# Altium PCB LPC55S69_MINI [C].PCBdoc (part 3 of 3)
Units mil, origin at the board's own origin, x right, y up, seen from the top; angles counter-clockwise.
Board outline 1610.03 x 1685.03 mil, 4 copper layers (Top Layer, PWR, GND, Bottom Layer), stack 39.556 mil thick; 73 components, 63 nets, 296 pads, 147 vias.
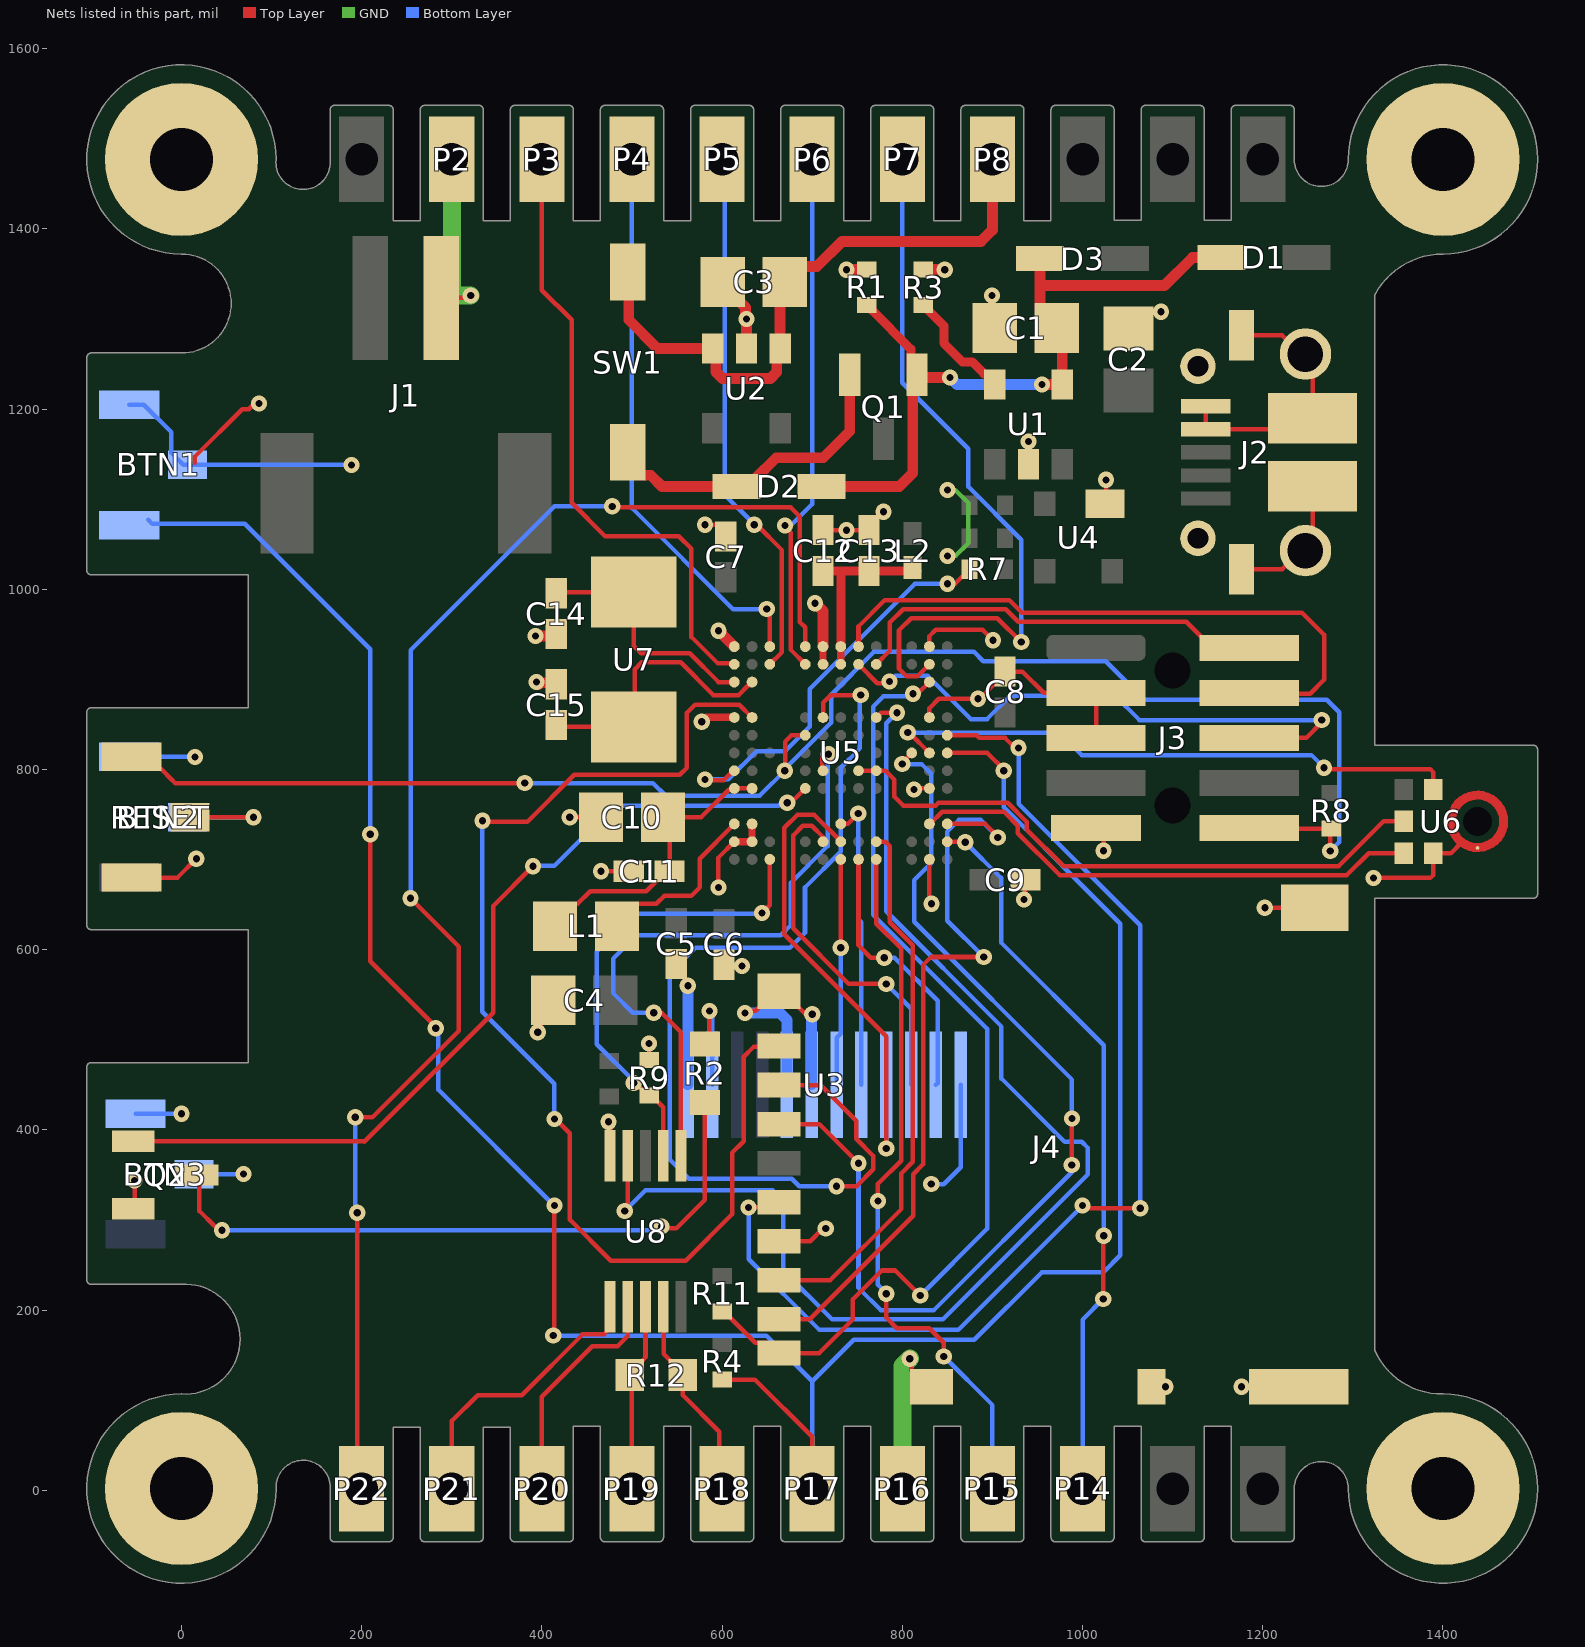
[diagram p4: the nets of this part, all layers, seen from the top]

## Via types
v1: diameter 18, hole 8, Top Layer to Bottom Layer, tented both sides, 147 vias

## Nets (pads, with @x,y where several pads share a name; then routed paths per layer and width w, separated by ;. In a path a pad name is that pad's centre, name@x,y a point inside that pad or via, vN(x,y) a via of type N, cw(c..) or ccw(c..) an arc to the next point about the centre after c; other vN are vias at no path point) (continued)
GND: BTN1.1 BTN1.S BTN2.1 BTN2.S BTN3.1 BTN3.S C1.1 C2.1 C3.1 C4.1 C5.1 C6.1 C7.1 C8.1 C9.1 C10.1 C11.1 C12.2 C13.1 C14.1 C15.1 J1.1 J2.4 J2.5 J2.MOUNT J3.3 J3.5 J3.9 J4.6 J4.CDA J4.M P2.1 P16.1 pad.2 Q2.2 R1.2 R3.1 R9.1 RESET.1 RESET.S U1.2 U2.2 U3.1 U3.5 U3.6 U3.12 U4.1 U5.B1 U5.B5 U5.B9 U5.B13 U5.H1 U5.H2 U5.M11 U5.M12 U5.N1 U5.N5 U5.N12 U6.2 U6.3 U8.5 | length 4054
  Top Layer w5: RESET.1@-55.43,680.07 -4.36,680.07 v1(16.57,701) ; Q2.2@-53.43,312.6 -52,314.03 v1(-52,344) ; RESET.S@9.53,747 v1(80,747) ; 15,1140.19 15,1147.26 67.5,1199.76 74.57,1199.76 v1@83.41,1208.59 ; v1@85.81,1211 85.81,1206.19 v1(86,1206) ; J1.1@288.37,1323.27 318.27,1323.27 v1(321,1326) ; v1(395.36,508.5) 398.72,511.87 398.72,530.17 C4.1@412.55,544 ; v1(431,747) C10.1@465.55,747 ; v1(465.55,687) C11.1@496.36,687 ; v1(474,409) 474,408 475.63,406.37 U8.5@475.63,371.32 ; R9.1@519,477.68 v1(519,495.94) ; C5.1@549,584 558.31,574.69 558.31,563.06 561.37,560 v1(562,560) ; v1(581,1071.5) 594.69,1071.5 604,1062.19 C7.1@604,1058.64 ; v1(596,669.08) 596,702.31 U5.N12@613.57,719.89 ; C6.1@602,583.36 602,582 v1(622,582) ; v1(625.45,529.86) 627.93,532.35 637.52,532.35 659.17,554.01 J4.M@663.11,554.01 680.3,536.82 684.18,536.82 693.24,527.76 699.38,527.76 v1(700,528.37) ; J4.6@663.11,276.45 697.77,276.45 712.05,290.74 v1(715.05,290.74) ; C12.2@712,1065.58 v1(738.09,1065.58) C13.1@763.06,1065.58 763.06,1070.5 772.37,1079.81 772.82,1079.81 v1(779,1086) ; v1(808.33,146.15) 810,144.48 810,133 827.97,115.03 J4.M@832.4,115.03 ; v1(813.02,777.87) 814.09,778.94 U5.B9@830.11,778.94 ; U5.B13@830.11,700.2 830.11,653.35 v1(832.4,651.06) ; U5.B5@830.11,857.69 830.11,868.11 840.6,878.6 v1(883.96,878.6) 885.6,878.6 901.41,894.41 904.69,894.41 C8.1@914,903.72 ; U5.B1@830.11,936.43 830.11,948.11 837,955 889,955 v1(900.58,943.43) ; v1(899.54,1326) 897.65,1324.1 897.65,1294.9 C1.1@902.55,1290 ; C8.1@914,904 C8.1@914,908.64 933.36,908.64 957.03,884.97 J3.3@1015,884.97 J3.5@1015,834.97 ; v1(935,655.62) 936.64,657.26 C9.1@936.64,677.69 ; J3.9@1015,734.97 1023.27,726.7 v1(1023.27,709.77) ; U4.1@1025,1094.8 1026.07,1095.88 v1(1026.07,1121.41) ; C2.1@1051,1289.45 1069.55,1308 v1(1087,1308) ; J4.CDA@1076.5,115.03 J4.CDA@1091.97,115.03 ; J2.MOUNT@1128.1,1247.47 J2.MOUNT@1134.68,1254.05 ; J2.5@1136.57,1203.18 J2.4@1136.57,1177.59 1242.96,1177.59 J2.MOUNT@1255.27,1189.89 1255.27,1253.18 1251.33,1257.12 1246.23,1257.12 1221.43,1281.92 J2.MOUNT@1176.53,1281.92 1176.53,1274.85 J2.MOUNT@1165.25,1263.57 ; J2.MOUNT@1172.15,1026.45 J2.MOUNT@1176.53,1022.08 1221.43,1022.08 1242.3,1042.94 J2.MOUNT@1247.39,1042.94 1255.27,1050.82 J2.MOUNT@1255.27,1114.11 ; v1@1176.56,115.03 J4.M@1239.88,115.03 ; v1(1202.32,646.53) J4.M@1257.6,646.53 1269.41,646.53 J4.M@1292.5,669.62 ; v1(1323,679.64) 1386.07,679.64 1389,682.57 U6.2@1389,707 1408.88,707 1420.97,719.09
  Top Layer w8: v1(577.5,853) 577.25,853.25 582,858 613.26,858 U5.N5@613.57,857.69 ; U5.N12@613.57,719.89 U5.M12@633.26,719.89 U5.M11@633.26,739.57 ; U5.H2@712,916.74 U5.H1@712,936.43
  Top Layer w12: v1(393,948) 413.64,948 C14.1@416,950.36 ; v1(394,897) 395,897 397,895 398.23,896.23 414.4,896.23 C15.1@416,894.64 ; v1(596,954) U5.N1@613.57,936.43 ; C3.1@605.88,1332.72 625.85,1312.75 625.85,1301.15 v1(627,1300) U2.2@627,1267.29 ; v1@704.25,983.53 712,975.79 U5.H1@712,936.43 ; v1(738.09,1354.68) R1.2@760.63,1354.69 ; R3.1@825.77,1351.92 R3.1@823,1354.68 v1(847.19,1354.68)
  GND w5: v1(850,1110) 859,1110 873,1096 873,1051 859.06,1037.06 v1(850.17,1037.06)
  GND w20: P2.1@300,1477 300,1326 v1(321,1326) ; P16.1@800,2 800,137.81 v1(808.33,146.15)
  Bottom Layer w5: BTN2.1@-58,813.93 v1(15,813.93) ; BTN1.1@-58,1204.93 -41.93,1204.93 -11.06,1174.06 -11.06,1151.25 2.19,1138 BTN1.S@6.96,1138 v1(188.63,1138) ; BTN3.1@-50.93,417.93 v1(-0.04,417.93) ; BTN2.S@6.96,747 76,747 v1@80,751 ; BTN3.S@15.03,350 BTN3.S@14.03,351 v1(69,351) ; v1@561.09,559 562,559.91 v1(562,560) ; v1@697.79,525.89 v1@699.31,527.41 ; U3.6@699.31,450.32 U3.6@699.53,450.11 ; v1(832.18,340.11) 832.65,339.64 846.07,339.64 864.88,358.45 U3.12@864.88,450.11
  Bottom Layer w12: U3.1@561.73,450.11 562,450.38 v1(562,560) ; v1(625.45,529.86) 664.25,529.86 671.97,522.14 U3.5@671.97,450.11 ; U3.6@699.31,450.32 v1@699.31,527.41
  other v1: 1092,115 1176.53,115 702.94,984.53 940,1164.08
ISP0: BTN1.2 P17.1 R4.1 U5.A7 | length 2836.1
  Top Layer w5: v1(209.63,728.13) 209.63,587.24 282.34,514.53 v1(282.34,512.8) ; v1(412.55,171.73) 412.55,169.65 413.88,168.32 v1(413.88,316) ; R4.1@600,122.91 636.47,122.91 700,59.38 P17.1@700,2 ; U5.A7@849.8,818.31 894.31,818.31 912.5,800.13 v1(912.5,798.63)
  Bottom Layer w5: BTN1.2@-37,1077.07 -32.61,1072.68 70.32,1072.68 209.63,933.37 v1(209.63,728.13) ; v1(282.34,512.8) 285.09,510.06 285.09,444.8 v1(413.88,316) ; v1@412.55,169.65 v1(412.55,171.73) 649.27,171.73 700,121 ; P17.1@700,2 700,121 ; v1(912.5,798.63) 912.5,758.29 1042,628.79 1042,260.81 1023.19,242 954.95,242 879.95,167 746,167 700,121
LCD_BL: Q2.1 U5.J9 | length 982.6
  Top Layer w5: Q2.1@-53.43,387.4 203.4,387.4 ; 202.88,386.88 203.4,387.4 ; v1(390,692.5) 346,648.5 346,530 203.4,387.4 ; v1(672.38,763.07) 672.38,759.01 U5.J9@692.32,778.94
  Bottom Layer w5: v1@391,693 414,693 480.97,759.97 662.95,759.97 663.56,760.59 669.89,760.59 v1(672.38,763.07)
LCD_CMD_DATA: U3.7 U5.G13 | length 252
  Top Layer w5: v1(731.69,602.28) U5.G13@731.69,700.2
  Bottom Layer w5: U3.7@727.09,450.11 727.09,502.28 731.69,506.87 731.69,598.76 v1(731.69,602.28)
LCD_RST: U3.11 U5.F13 | length 302.7
  Top Layer w5: U5.F13@751.37,700.2 751.37,604.78 765.15,591 v1(780,591)
  Bottom Layer w5: v1(780,591) 791.5,591 791.61,590.88 839.17,543.33 839.17,451.95 U3.11@837.32,450.11
LCD_SPI_CS: U3.8 U5.G11 | length 326.4
  Top Layer w5: U5.G11@731.69,739.57 739.57,739.57 v1(751,751)
  Bottom Layer w5: v1(751,751) 751,634 754.65,630.35 U3.8@754.65,450.11
LCD_SPI_MOSI: U3.10 U5.H12 | length 403.3
  Top Layer w5: U5.H12@712,719.89 712,725 699.41,737.59 689.62,737.59 678.82,726.79 678.82,702.62 678.82,694.61 678.82,628.59 678.82,623.79 740.61,562 v1(782.2,562)
  Bottom Layer w5: v1(782.2,562) 809.76,534.44 U3.10@809.76,450.11
LCD_SPI_SCK: U3.9 U5.G12 | length 555.1
  Top Layer w5: U5.G12@731.69,719.89 731.69,720.32 702.43,749.57 683.22,749.57 668.82,735.17 668.82,698.48 668.82,690.47 668.82,632.73 668.82,617.22 782.2,503.83 v1(782.2,379.28)
  Bottom Layer w5: v1(782.2,379.28) U3.9@782.2,450.11
MIC_BCLK: U5.B7 U6.4 | length 655.9
  Top Layer w5: v1(806,841) 809.3,841 809.58,840.72 808.64,839.78 U5.B7@830.11,818.31 ; v1(1268,802) 1269.87,800.13 1386.07,800.13 1389,797.2 U6.4@1389,777.87
  Bottom Layer w5: v1(806,841) 806.36,841 974,841 999,816 1254,816 v1(1268,802)
MIC_DATA: U5.E8 U5.F8 U6.6 | length 688.5
  Top Layer w5: U5.F8@751.37,798.63 U5.E8@771.06,798.63 781.31,798.63 791.06,788.87 791.06,769.94 801.03,759.97 836.96,759.97 840.06,763.07 916.93,763.07 938.27,741.73 938.27,733.27 979.04,692.5 1284.06,692.5 1333.99,742.43 U6.6@1356.64,742.43
MIC_WS: U5.B11 U6.1 | length 576.5
  Top Layer w5: U5.B11@830.11,739.57 830.7,739.57 844.2,753.07 912.78,753.07 928.27,737.59 928.27,729.13 974.89,682.5 1293.01,682.5 1317.51,707 U6.1@1356.64,707
NetC1_2: C1.2 D1.2 D2.1 D3.2 Q1.1 R1.1 U1.4 | length 851.4
  Top Layer w10: R1.1@760.63,1315.31 762.6,1315.31 766.46,1311.46 766.46,1309.49 809.59,1266.35 809.59,1244.68 Q1.1@816.4,1237.87
  Top Layer w12: D2.1@710.35,1114.11 796.68,1114.11 811.55,1128.97 811.55,1233.01 Q1.1@814.47,1235.93 ; Q1.1@816.4,1237.87 Q1.1@814.47,1235.93 ; v1(853,1235) 815.4,1235 Q1.1@814.47,1235.93 ; D3.2@952.76,1367 952.76,1339.32 ; v1(954.95,1227.29) U1.4@977.4,1227.29 977.4,1284.05 C1.2@971.45,1290 971.45,1292.95 952.76,1311.65 952.76,1339.32 ; D1.2@1154,1368 1122,1368 1091,1337 955.08,1337 952.76,1339.32
  Bottom Layer w12: v1(853,1235) 860.71,1227.29 v1(954.95,1227.29)
NetC10_2: C10.2 C11.2 L1.1 U5.M9 U5.N9 | length 329.9
  Top Layer w5: L1.1@414.55,626 414.55,628.95 436.66,651.06 439.61,651.06 453.55,665 516,665 527.41,676.41 527.41,677.69 536.72,687 C11.2@541.64,687 541.64,739.81 C10.2@534.45,747 576.63,747 607.23,777.61 612.24,777.61 U5.N9@613.57,778.94 U5.M9@633.26,778.94
NetC12_1: C12.1 C13.2 L2.2 U5.G1 U5.G2 | length 244.2
  Top Layer w5: C13.2@763.06,1016.06 C13.2@763.06,1020.31
  Top Layer w8: U5.G2@731.69,916.74 U5.G1@731.69,936.43
  Top Layer w10: C12.1@712,1020.31 C13.2@763.06,1020.31 ; U5.G1@731.69,936.43 731.69,1020.31 C13.2@763.06,1020.31 ; L2.2@817.01,1020.31 C13.2@763.06,1020.31
NetC14_2: C14.2 U5.N3 U7.2 | length 306.6
  Top Layer w5: C14.2@416,995.64 417.17,996.8 U7.2@502,996.8 ; U7.2@513,972.14 513,990.8 507,996.8 U7.2@502,996.8 ; U5.N3@613.57,897.06 595.94,897.06 564,929 510,929 502,937 U7.2@502,996.8
NetC15_2: C15.2 U5.M3 U7.1 | length 306.3
  Top Layer w5: C15.2@416,849.36 418.17,847.2 U7.1@502,847.2 503,848.2 503,911 511,919 554,919 590.44,882.56 618.22,882.56 629.17,893.5 630.53,893.5 633.26,896.23 U5.M3@633.26,897.06
NetD2_2: D2.2 Q1.2 SW1.1 | length 356.7
  Top Layer w12: SW1.1@495.32,1152 495.32,1140.19 509,1126.5 520.81,1126.5 533.21,1114.11 D2.2@615.87,1114.11 623.65,1121.89 635.89,1121.89 660,1146 712.19,1146 741.6,1175.41 Q1.2@741.6,1237.87
NetL1_2: L1.2 U5.N11 | length 197.6
  Top Layer w5: L1.2@483.45,626 483.45,628.95 505.56,651.06 527.06,651.06 536,660 566,660 575.08,669.08 575.08,701.08 U5.N11@613.57,739.57
NetQ2_3: Q2.3 R2.1 | length 734.6
  Top Layer w5: Q2.3@17.43,350 20,347.43 20,310 36.45,293.55 36.69,293.55 41.48,288.76 v1(45,288.76) ; v1(532.87,292.95) 535.14,290.68 549,290.68 581,322.68 R2.1@581,430.52
  Bottom Layer w5: v1(45,288.76) 528.69,288.76 v1(532.87,292.95)
NetR2_2: R2.2 U3.2 | length 123.5
  Top Layer w5: R2.2@581,495.48 580.68,495.8 583.44,498.56 581.73,500.27 586,504.54 v1(586,532)
  Bottom Layer w5: v1(586,532) 589,529 589,499 589.29,498.71 U3.2@589.29,450.11
NetR3_2: R3.2 U1.5 | length 131.3
  Top Layer w10: R3.2@823,1315.31 824.97,1315.31 828.83,1311.46 828.83,1309.49 846,1292.31 846,1273.15 866.71,1252.44 877.45,1252.44 890.87,1239.02 895.79,1239.02 902.6,1232.21 U1.5@902.6,1227.29
NetR7_1: R7.1 U5.N8 | length 451.6
  Top Layer w5: v1(581,789) 585.69,789 586.4,788.29 601.89,788.29 612.23,798.63 U5.N8@613.57,798.63 ; v1(850,1006) 858.55,1006 R7.1@874.63,1022.08
  Bottom Layer w5: v1(581,789) 607,789 638.5,820.5 670,820.5 697,847.5 697,889 814,1006 v1(850,1006)
PIO0_15: P5.1 U5.L2 | length 595.1
  Top Layer w5: v1(635.63,1071.5) 638.5,1071.5 666.44,1043.56 666.44,930.24 U5.L2@652.94,916.74
  Bottom Layer w5: P5.1@600,1477 603,1474 603,1104.63 635.63,1072 v1(635.63,1071.5)
PIO0_16: P6.1 U5.J2 | length 585.9
  Top Layer w5: v1(669.94,1070.86) 669.94,1069.06 676.44,1062.56 676.44,932.61 U5.J2@692.32,916.74
  Bottom Layer w5: v1(669.94,1070.86) 676.44,1070.86 700.11,1094.53 700.11,1476.89 P6.1@700,1477
PIO0_21: P14.1 U5.A12 | length 811
  Top Layer w5: U5.A12@849.8,719.89 869.29,719.89 v1(869.89,719.3) ; v1(1023,212.5) 1023.25,212.75 1023.25,282.27 v1(1023.5,282.52)
  Bottom Layer w5: v1(869.89,719.3) 909.54,679.64 909.54,607.98 1023.5,494.02 v1(1023.5,282.52) ; P14.1@1000,2 1000,189.5 v1(1023,212.5)
PIO0_23: P22.1 U5.J1 | length 1665.3
  Top Layer w5: v1(193,414) 212,414 308,510 308,603.28 v1(254.26,657.02) ; v1(195,308) 195,7 P22.1@200,2 ; v1(478,1092) v1@479,1091 ; v1@480,1090 v1@479,1091 ; U5.J1@692.32,936.43 692.32,957.68 686.44,963.56 686.44,1080.56 676,1091 v1@479,1091
  Bottom Layer w5: v1(193,414) 193,310 v1(195,308) ; v1(254.26,657.02) 254.26,932.26 414,1092 v1(478,1092)
PIO0_27: P3.1 U5.N2 | length 706.9
  Top Layer w5: P3.1@400,1477 400,1332 433,1299 433,1096 470.06,1058.94 552.06,1058.94 566,1045 566,947 594.92,918.08 612.24,918.08 U5.N2@613.57,916.74
PIO0_29: U5.H8 U8.1 | length 712.2
  Top Layer w5: v1(524.06,530.06) 532.81,530.06 554.37,508.5 U8.1@554.37,371.32 ; U5.H8@712,798.63 711,799.63 711,812.53 v1@717,818.53
  Bottom Layer w5: v1(524.06,530.06) 500.94,530.06 479,552 479,590 505,616 665,616 676.44,627.44 676.44,674.44 717,715 v1@717,818.53
  other v1: 718,817
PIO0_30: U5.E5 U8.4 | length 1403.6
  Top Layer w5: v1(492,310) 492,313.52 495.32,316.83 U8.4@495.32,371.32 ; U5.E5@771.06,857.69 776.37,863 793.25,863 v1(794,863)
  Bottom Layer w5: v1(492,310) 515,333 656,333 668,321 668,243.72 722.07,189.65 844.78,189.65 1006,350.87 1006,380 999,387 980,387 910,457 910,514.76 782.2,642.55 782.2,851.2 v1(794,863)
PIO0_31: P4.1 U5.L1 | length 625.9
  Top Layer w5: v1(649.6,978) 652.94,974.66 U5.L1@652.94,936.43
  Bottom Layer w5: P4.1@500,1477 500,1090.17 612.17,978 v1(649.6,978)
PIO1_4: P7.1 U5.B2 | length 828.1
  Top Layer w5: U5.B2@830.11,916.74 816.61,903.24 804.83,903.24 796.32,911.76 796.32,954.47 809.84,968 841.38,968 886.62,968 905.5,968 v1(932,941.5)
  Bottom Layer w5: P7.1@800,1477 800,1229.06 873,1156.06 873,1114 932,1055 v1(932,941.5)
PIO1_26: P15.1 U5.E13 | length 794
  Top Layer w5: U5.E13@771.06,700.2 771.06,628.94 798.7,601.3 798.7,365.87 772.95,340.11 v1(772.95,321.07) ; v1(782.2,218.18) 782.2,191.8 794,180 830,180 846,164 v1(846,148.72)
  Bottom Layer w5: v1(772.95,321.07) 772.95,228.26 782.2,219 v1(782.2,218.18) ; v1(846,148.72) 900,94.72 P15.1@900,2
PWR_SWITCH: C3.2 P8.1 SW1.2 U2.1 U2.3 | length 697
  Top Layer w12: SW1.2@495.32,1352 496.36,1350.95 496.36,1299 528.07,1267.29 U2.3@589.6,1267.29 593.34,1263.55 593.34,1241.03 600.37,1234 653.63,1234 660.66,1241.03 660.66,1263.55 U2.1@664.4,1267.29 664.4,1335.95 C3.2@669.45,1341 686.47,1358.03 705.03,1358.03 733,1386 887.15,1386 900,1398.85 P8.1@900,1477
RE: R9.2 U5.L13 U8.2 | length 533.7
  Top Layer w5: v1(502,452) 503.23,452 506.23,449 516.92,438.31 R9.2@519,438.31 520.44,436.88 523.12,436.88 534.69,425.31 534.69,417.33 U8.2@534.69,371.32 ; v1(644.27,640.73) 652.94,649.4 U5.L13@652.94,700.2
  Bottom Layer w5: v1(502,452) 502,451.11 504.11,449 505.56,450.44 503.44,452.56 461,495 461,598 502.63,639.63 643.17,639.63 v1(644.27,640.73)
RST: J3.10 R8.1 RESET.2 U5.J6 | length 1783.7
  Top Layer w5: RESET.2@-36,812.21 -24.47,800.68 -22.75,800.68 -10.63,788.56 -7.04,784.97 v1(380.89,784.97) ; v1(669.45,798.63) 670,799.18 670,831 677,838 U5.J6@692.32,838 ; J3.10@1185,734.97 1185.66,734.31 R8.1@1276,734.31 1275,733.31 v1(1275,709.5)
  Bottom Layer w5: v1(380.89,784.97) 523.16,784.97 537.36,770.77 641.59,770.77 671.94,801.12 671.94,802.94 721.09,852.09 721.09,883.09 768.5,930.5 879.5,930.5 889.78,920.22 1025.89,920.22 1068.61,877.5 1270.83,877.5 1285,863.33 1285,719.5 v1(1275,709.5)
RX_N: P19.1 R12.2 U8.8 | length 210.3
  Top Layer w5: P19.1@500,2 500,125.47 R12.2@497.47,128 497.47,129.97 510.72,143.22 515,147.5 U8.8@515,204
RX_P: P18.1 R12.1 U8.9 | length 229.1
  Top Layer w5: U8.9@534.69,204 535,203.69 535,151.5 543.28,143.22 556.53,129.97 556.53,105.71 597,65.24 597,5 P18.1@600,2
SD_CD: J4.CDB R11.2 U5.B3 | length 1117.3
  Top Layer w5: R11.2@600,198.5 601.97,198.5 608.33,192.14 608.33,192.04 636.66,163.71 651.83,163.71 J4.CDB@663.11,152.43 707.83,152.43 745.23,189.83 745.23,212.23 777,244 792.15,244 v1(819.91,216.24) ; v1@809,881 809,881.43 812.54,884.97 818.03,884.97 U5.B3@830.11,897.06
  Bottom Layer w5: 767.5,757.83 767.5,744.17 767.47,638.96 894,512.43 894,290.15 820,216.15 v1(819.91,216.24) ; 767.47,757.86 767.47,869.47 779,881 810,881 812,883 v1(812,884)
SD_CLK: J4.5 U5.A6 | length 1271
  Top Layer w5: v1(629.44,314.05) 657.4,314.05 J4.5@663.11,319.76 ; U5.A6@849.8,838 882.53,838 885.56,834.97 914,834.97 924.97,824 v1(929,824) ; v1(1000,316) 1003,313 v1(1064,313)
  Bottom Layer w5: v1(629.44,314.05) 629.44,256.56 708,178 862,178 v1(1000,316) ; v1(929,824) 929,762.07 1064,627.07 v1(1064,313)
SD_CMD: J4.3 U5.C7 | length 1131
  Top Layer w5: J4.3@663.11,406.37 708.06,406.37 v1(751.37,363.06) ; v1(800,806) 800,807.89 U5.C7@810.43,818.31 ; v1(988,361) 988,377.69 988.26,377.95 v1(988.26,412.66)
  Bottom Layer w5: v1(751.37,363.06) 751.37,224.63 776.28,199.72 801.49,199.72 801.56,199.65 834.65,199.65 988,353 v1(988,361) ; v1(800,806) 821.35,806 832.18,795.17 832.18,696.18 813.3,677.3 813.3,630.85 988.26,455.89 v1(988.26,412.66)
SD_D0: J4.7 U5.E12 | length 604.1
  Top Layer w5: J4.7@663.11,233.14 719.83,233.14 799,312.31 799,352.02 811.55,364.57 811.55,605.02 786,630.57 786,715 781.11,719.89 U5.E12@771.06,719.89
SD_D1: J4.8 U5.A11 | length 839.1
  Top Layer w5: J4.8@663.11,189.83 697.19,189.83 812,304.64 812,350.88 823,361.88 823,583 831.91,591.91 888.21,591.91 v1(890.31,591.91) ; U5.A11@849.8,739.57 892.27,739.57 906.02,725.83 v1(906.02,724.6)
  Bottom Layer w5: v1(890.31,591.91) 850,632.22 850,731.11 862.89,744 887.06,744 906.02,725.05 v1(906.02,724.6)
SD_D2: J4.1 U5.M5 | length 1324.9
  Top Layer w5: v1(334,743) 333,742 384,742 436,794 553,794 561,802 561,863 570,872 618.94,872 U5.M5@633.26,857.69 ; v1(413.88,411.99) 415.22,411.99 431,396.21 431,300.55 476.55,255 559.58,255 611,306.42 611,374.58 624,387.58 624,481.19 634.92,492.11 662.24,492.11 J4.1@663.11,492.98
  Bottom Layer w5: v1(334,743) 334,531 413.88,451.12 v1(413.88,411.99)
SD_D3: J4.2 U5.H5 | length 1131
  Top Layer w5: J4.2@663.11,449.68 709.37,449.68 748.77,410.28 748.77,390.21 767.87,371.1 767.87,356.23 749.21,337.57 v1(727.09,337.57) ; U5.H5@712,857.69 712,874.16 720.4,882.56 v1@748.77,882.56
  Bottom Layer w5: v1(727.09,337.57) 685.64,337.57 677.21,346 563.23,346 542,367.23 542,573.86 570.42,602.28 675.28,602.28 692,619 692,669.1 731.69,708.79 731.69,802 753,823.31 753,881.79 v1(753.77,882.56)
SWD_CLK: J3.4 U5.F1 | length 706.8
  Top Layer w5: U5.F1@751.37,936.43 751.37,958.74 780.63,988 849.67,988 878.33,988 918.76,988 932.73,974.03 1243.5,974.03 1268,949.52 1268,899.56 1252.51,884.07 1185.91,884.07 J3.4@1185,884.97
SWD_IO: J3.2 U5.E2 | length 475.4
  Top Layer w5: U5.E2@771.06,916.74 786.32,932 786.32,963.25 801.06,978 845.52,978 882.48,978 914.61,978 928.59,964.03 1114.97,964.03 1144.03,934.97 J3.2@1185,934.97
SWO: J3.6 U5.F2 | length 658.5
  Top Layer w5: U5.F2@751.37,916.74 772.28,895.83 784.58,895.83 785.91,897.16 v1(785.91,897.5) ; J3.6@1185,834.97 1248.08,834.97 1265.5,852.39 v1(1265.5,854.89)
  Bottom Layer w5: v1(785.91,897.5) 792.41,904 828,904 876,856 894,856 920,882 1036.02,882 1063.13,854.89 v1(1265.5,854.89)
TX_N: P20.1 U8.7 | length 257.9
  Top Layer w5: P20.1@400,2 400,104 456,160 484,160 495.32,171.31 U8.7@495.32,204
TX_P: P21.1 U8.6 | length 317.5
  Top Layer w5: P21.1@300,2 300,77 328.71,105.71 377.71,105.71 445,173 469,173 475.63,179.63 U8.6@475.63,204
pads on no net: J1.M1 J1.M2 J3.7 J3.8 J3.A U2.4 U5.A1 U5.A2 U5.B6 U5.B8 U5.B12 U5.C1 U5.C2 U5.E1 U5.E6 U5.E7 U5.E9 U5.F5 U5.F6 U5.F9 U5.F12 U5.G3 U5.G5 U5.G6 U5.G8 U5.G9 U5.H6 U5.H9 U5.J5 U5.J7 U5.J8 U5.J12 U5.J13 U5.L7 U5.M2 U5.M7 U6.PORT_HOLE
copper on no net: | length 0.6
  Top Layer w5: 633.26,916.15 633.26,916.74

## Polygon pours and split planes (outlines as drawn)
GND on GND "GND_L03_P001" (solid, remove dead copper, pour order 1): -300,1807 1790,1807 1790,-205 -300,-205
+3.3v on PWR "+3.3V_L02_P000" (solid, remove dead copper, pour order 0): -269,1730 -269,-444 1899,-444 1899,1730

## Keep-outs
Keep-Out Layer:
  lines w0.1: 0.03,1262.21 ccw(c0,1257.2) 0,1262.21 -100,1262.21 ccw(c-100,1257.2) -105.01,1257.2 -105.01,1020.98 ccw(c-100,1020.98) -100,1015.96 74.04,1015.96 74.04,868.51 -100,868.51 ccw(c-100,863.5) -105.01,863.5 -105.01,627.28 ccw(c-100,627.28) -100,622.26 74.04,622.26 74.04,474.81 -100,474.81 ccw(c-100,469.8) -105.01,469.8 -105.01,233.57 ccw(c-100,233.57) -100,228.56 0,228.56 ccw(c0,233.57) 0.32,228.57 ; 0.03,1262.21 ccw(c0.31,1317.1) 55.2,1317.1 ccw(c0.31,1317.1) 0.03,1371.99 ; 0.03,1262.21 0.03,1262.21 ; 0.03,1371.99 cw(c0,1377) 0,1371.99 cw(c0,1477) 105.01,1477 cw(c100,1477) 104.99,1476.51 ; 0.03,1371.99 0.03,1371.99 ; 0.35,107 ccw(c0,102) 0,107.01 ccw(c0,2) 105.01,2 ccw(c100,2) 105.01,2.2 ; 0.32,107 ccw(c4.21,167.79) 0.35,107 ; 0.35,107 ccw(c4.21,167.79) 65.12,167.79 ccw(c4.21,167.79) 0.32,228.57 ; 0.32,107 0.35,107 ; 0.32,228.57 0.32,228.57 ; 105.01,2.2 cw(c135,3.43) 165.01,3.43 cw(c135,3.43) 164.99,2.2 ; 105.01,2.2 105.01,2.2 ; 104.99,1476.51 cw(c135,1473.79) 104.99,1476.54 104.99,1476.51 ; 104.99,1476.51 ccw(c135,1473.79) 165.13,1473.79 ccw(c135,1473.79) 165.01,1476.51 ; 164.99,2.2 ccw(c170,2) 164.99,2 164.99,-52.09 ccw(c170,-52.09) 170,-57.11 230,-57.11 ccw(c230,-52.09) 235.01,-52.09 235.02,70.29 264.99,70.29 264.99,-52.09 ccw(c270,-52.09) 270,-57.11 330,-57.11 ccw(c330,-52.09) 335.01,-52.09 335.02,70.29 364.99,70.29 364.99,-52.09 ccw(c370,-52.09) 370,-57.11 430,-57.11 ccw(c430,-52.09) 435.01,-52.09 435.02,71.16 464.99,71.16 464.99,-52.09 ccw(c470,-52.09) 470,-57.11 530,-57.11 ccw(c530,-52.09) 535.01,-52.09 535.02,71.16 564.99,71.16 564.99,-52.09 ccw(c570,-52.09) 570,-57.11 630,-57.11 ccw(c630,-52.09) 635.01,-52.09 635.02,71.16 664.99,71.16 664.99,-52.09 ccw(c670,-52.09) 670,-57.11 730,-57.11 ccw(c730,-52.09) 735.01,-52.09 735.02,71.16 764.99,71.16 764.99,-52.09 ccw(c770,-52.09) 770,-57.11 830,-57.11 ccw(c830,-52.09) 835.01,-52.09 835.02,71.16 864.99,71.16 864.99,-52.09 ccw(c870,-52.09) 870,-57.11 930,-57.11 ccw(c930,-52.09) 935.01,-52.09 935.02,71.16 964.99,71.16 964.99,-52.09 ccw(c970,-52.09) 970,-57.11 1030,-57.11 ccw(c1030,-52.09) 1035.01,-52.09 1035.02,71.16 1064.99,71.16 1064.99,-52.09 ccw(c1070,-52.09) 1070,-57.11 1130,-57.11 ccw(c1130,-52.09) 1135.01,-52.09 1135.02,71.16 1164.99,71.16 1164.99,-52.09 ccw(c1170,-52.09) 1170,-57.11 1230,-57.11 ccw(c1230,-52.09) 1235.01,-52.09 1235.02,2 cw(c1265,2) 1294.99,2 ccw(c1400,2) 1505.01,2 ccw(c1400,2) 1400,107.01 ccw(c1400,102) 1399.88,107.01 ; 164.99,2.2 164.99,2.2 ; 165.01,1476.51 cw(c170,1477) 164.99,1477 164.99,1532 cw(c170,1532) 170,1537.01 230,1537.01 cw(c230,1532) 235.01,1532 235.02,1408.75 264.99,1408.75 264.99,1532 cw(c270,1532) 270,1537.01 330,1537.01 cw(c330,1532) 335.01,1532 335.02,1408.75 364.99,1408.75 364.99,1532 cw(c370,1532) 370,1537.01 430,1537.01 cw(c430,1532) 435.01,1532 435.02,1408.75 464.99,1408.75 464.99,1532 cw(c470,1532) 470,1537.01 530,1537.01 cw(c530,1532) 535.01,1532 535.02,1408.75 564.99,1408.75 564.99,1532 cw(c570,1532) 570,1537.01 630,1537.01 cw(c630,1532) 635.01,1532 635.02,1408.75 664.99,1408.75 664.99,1532 cw(c670,1532) 670,1537.01 730,1537.01 cw(c730,1532) 735.01,1532 735.02,1408.75 764.99,1408.75 764.99,1532 cw(c770,1532) 770,1537.01 830,1537.01 cw(c830,1532) 835.01,1532 835.02,1408.75 864.99,1408.75 864.99,1532 cw(c870,1532) 870,1537.01 930,1537.01 cw(c930,1532) 935.01,1532 935.02,1408.75 964.99,1408.75 964.99,1532 cw(c970,1532) 970,1537.01 1030,1537.01 cw(c1030,1532) 1035.01,1532 1035.02,1409.61 1064.99,1409.61 1064.99,1532 cw(c1070,1532) 1070,1537.01 1130,1537.01 cw(c1130,1532) 1135.01,1532 1135.02,1409.61 1164.99,1409.61 1164.99,1532 cw(c1170,1532) 1170,1537.01 1230,1537.01 cw(c1230,1532) 1235.01,1532 1235.02,1477 ccw(c1265,1477) 1294.99,1477 cw(c1400,1477) 1505.01,1477 cw(c1400,1477) 1400,1371.99 ; 165.01,1476.51 165.01,1476.51 ; 1399.88,107.01 cw(c1398.53,187.93) 1324.23,155.85 1324.23,656.99 1500,656.99 ccw(c1500,662) 1505.01,662 1505.02,822 ccw(c1500,822) 1500,827.01 1324.23,827.01 1324.23,1326.81 cw(c1400.19,1285.54) 1399.98,1371.98 ; 1399.88,107.01 ccw(c1398.53,187.93) 1399.91,107.01 ; 1399.88,107.01 1399.91,107.01 ; 1399.88,107.01 1399.88,107.01 ; 1400.01,1371.99 ccw(c1400.19,1285.54) 1399.98,1371.98 ; 1400,1371.99 1400.01,1371.99
  lines w1: 0.03,1262.21 ccw(c0,1257.2) 0,1262.21 -100,1262.21 ccw(c-100,1257.2) -105.01,1257.2 -105.01,1020.98 ccw(c-100,1020.98) -100,1015.96 74.04,1015.96 74.04,868.51 -100,868.51 ccw(c-100,863.5) -105.01,863.5 -105.01,627.28 ccw(c-100,627.28) -100,622.26 74.04,622.26 74.04,474.81 -100,474.81 ccw(c-100,469.8) -105.01,469.8 -105.01,233.57 ccw(c-100,233.57) -100,228.56 0,228.56 ccw(c0,233.57) 0.32,228.57 ; 0.03,1262.21 ccw(c0.31,1317.1) 55.2,1317.1 ccw(c0.31,1317.1) 0.03,1371.99 ; 0.03,1262.21 0.03,1262.21 ; 0.03,1371.99 cw(c0,1377) 0,1371.99 cw(c0,1477) 105.01,1477 cw(c100,1477) 104.99,1476.51 ; 0.03,1371.99 0.03,1371.99 ; 0.35,107 ccw(c0,102) 0,107.01 ccw(c0,2) 105.01,2 ccw(c100,2) 105.01,2.2 ; 0.32,107 ccw(c4.21,167.79) 0.35,107 ; 0.35,107 ccw(c4.21,167.79) 65.12,167.79 ccw(c4.21,167.79) 0.32,228.57 ; 0.32,107 0.35,107 ; 0.32,228.57 0.32,228.57 ; 105.01,2.2 cw(c135,3.43) 165.01,3.43 cw(c135,3.43) 164.99,2.2 ; 105.01,2.2 105.01,2.2 ; 104.99,1476.51 cw(c135,1473.79) 104.99,1476.54 104.99,1476.51 ; 104.99,1476.51 ccw(c135,1473.79) 165.13,1473.79 ccw(c135,1473.79) 165.01,1476.51 ; 164.99,2.2 ccw(c170,2) 164.99,2 164.99,-52.09 ccw(c170,-52.09) 170,-57.11 230,-57.11 ccw(c230,-52.09) 235.01,-52.09 235.02,70.29 264.99,70.29 264.99,-52.09 ccw(c270,-52.09) 270,-57.11 330,-57.11 ccw(c330,-52.09) 335.01,-52.09 335.02,70.29 364.99,70.29 364.99,-52.09 ccw(c370,-52.09) 370,-57.11 430,-57.11 ccw(c430,-52.09) 435.01,-52.09 435.02,71.16 464.99,71.16 464.99,-52.09 ccw(c470,-52.09) 470,-57.11 530,-57.11 ccw(c530,-52.09) 535.01,-52.09 535.02,71.16 564.99,71.16 564.99,-52.09 ccw(c570,-52.09) 570,-57.11 630,-57.11 ccw(c630,-52.09) 635.01,-52.09 635.02,71.16 664.99,71.16 664.99,-52.09 ccw(c670,-52.09) 670,-57.11 730,-57.11 ccw(c730,-52.09) 735.01,-52.09 735.02,71.16 764.99,71.16 764.99,-52.09 ccw(c770,-52.09) 770,-57.11 830,-57.11 ccw(c830,-52.09) 835.01,-52.09 835.02,71.16 864.99,71.16 864.99,-52.09 ccw(c870,-52.09) 870,-57.11 930,-57.11 ccw(c930,-52.09) 935.01,-52.09 935.02,71.16 964.99,71.16 964.99,-52.09 ccw(c970,-52.09) 970,-57.11 1030,-57.11 ccw(c1030,-52.09) 1035.01,-52.09 1035.02,71.16 1064.99,71.16 1064.99,-52.09 ccw(c1070,-52.09) 1070,-57.11 1130,-57.11 ccw(c1130,-52.09) 1135.01,-52.09 1135.02,71.16 1164.99,71.16 1164.99,-52.09 ccw(c1170,-52.09) 1170,-57.11 1230,-57.11 ccw(c1230,-52.09) 1235.01,-52.09 1235.02,2 cw(c1265,2) 1294.99,2 ccw(c1400,2) 1505.01,2 ccw(c1400,2) 1400,107.01 ccw(c1400,102) 1399.88,107.01 ; 164.99,2.2 164.99,2.2 ; 165.01,1476.51 cw(c170,1477) 164.99,1477 164.99,1532 cw(c170,1532) 170,1537.01 230,1537.01 cw(c230,1532) 235.01,1532 235.02,1408.75 264.99,1408.75 264.99,1532 cw(c270,1532) 270,1537.01 330,1537.01 cw(c330,1532) 335.01,1532 335.02,1408.75 364.99,1408.75 364.99,1532 cw(c370,1532) 370,1537.01 430,1537.01 cw(c430,1532) 435.01,1532 435.02,1408.75 464.99,1408.75 464.99,1532 cw(c470,1532) 470,1537.01 530,1537.01 cw(c530,1532) 535.01,1532 535.02,1408.75 564.99,1408.75 564.99,1532 cw(c570,1532) 570,1537.01 630,1537.01 cw(c630,1532) 635.01,1532 635.02,1408.75 664.99,1408.75 664.99,1532 cw(c670,1532) 670,1537.01 730,1537.01 cw(c730,1532) 735.01,1532 735.02,1408.75 764.99,1408.75 764.99,1532 cw(c770,1532) 770,1537.01 830,1537.01 cw(c830,1532) 835.01,1532 835.02,1408.75 864.99,1408.75 864.99,1532 cw(c870,1532) 870,1537.01 930,1537.01 cw(c930,1532) 935.01,1532 935.02,1408.75 964.99,1408.75 964.99,1532 cw(c970,1532) 970,1537.01 1030,1537.01 cw(c1030,1532) 1035.01,1532 1035.02,1409.61 1064.99,1409.61 1064.99,1532 cw(c1070,1532) 1070,1537.01 1130,1537.01 cw(c1130,1532) 1135.01,1532 1135.02,1409.61 1164.99,1409.61 1164.99,1532 cw(c1170,1532) 1170,1537.01 1230,1537.01 cw(c1230,1532) 1235.01,1532 1235.02,1477 ccw(c1265,1477) 1294.99,1477 cw(c1400,1477) 1505.01,1477 cw(c1400,1477) 1400,1371.99 ; 165.01,1476.51 165.01,1476.51 ; 1399.88,107.01 cw(c1398.53,187.93) 1324.23,155.85 1324.23,656.99 1500,656.99 ccw(c1500,662) 1505.01,662 1505.02,822 ccw(c1500,822) 1500,827.01 1324.23,827.01 1324.23,1326.81 cw(c1400.19,1285.54) 1399.98,1371.98 ; 1399.88,107.01 ccw(c1398.53,187.93) 1399.91,107.01 ; 1399.88,107.01 1399.91,107.01 ; 1399.88,107.01 1399.88,107.01 ; 1400.01,1371.99 ccw(c1400.19,1285.54) 1399.98,1371.98 ; 1400,1371.99 1400.01,1371.99

## Other copper
Top Layer:
  rectangle net GND: -48.43,1031 70,1241.03

## Silkscreen, mask and mechanical layers (free items; w line width, h text height)
Top Overlay:
  text "GND" at -64,1101 h50 r90
  text "LPC55S69" at 282,1012 h65 r270
  text "Mini Monkey" at 152,1011 h55 r270
  text "2020-11-23" at 104,1010 h35 r270
  text "C" at 85.81,660 h150 r270
  text "M" at 84,494 h550 r270
Bottom Overlay:
  lines w15: 1344,708 1413,708 ; 1344,779 1415,779 ; 1469,677 cw(c1469,742) 1469,807 1469,677
  text "11" at 1268,1412 h40
  text "1" at 169,1411 h40
  text "1" at 550,343 h75
  text "22" at 154,40 h40
  text "12" at 1285,40 h40
[8] Board Outline:
  lines w1: 370,75.31 330,75.31 330,-52.09 270,-52.09 270,75.31 230,75.31 230,-52.09 170,-52.09 170,2 ccw(c135,3.43) 100,2 cw(c0,2) 0,102 ccw(c4.21,167.79) 0,233.57 -100,233.57 -100,469.8 79.06,469.8 79.06,627.28 -100,627.28 -100,863.5 79.06,863.5 79.06,1020.98 -100,1020.98 -100,1257.2 0,1257.2 ccw(c0.31,1317.1) 0,1377 cw(c0,1477) 100,1477 ccw(c135,1473.79) 170,1477 170,1532 230,1532 230,1403.73 270,1403.73 270,1532 330,1532 330,1403.73 370,1403.73 370,1532 430,1532 430,1403.73 470,1403.73 470,1532 530,1532 530,1403.73 570,1403.73 ; 370,76.17 370,-52.09 430,-52.09 430,76.17 470,76.17 470,-52.09 530,-52.09 530,76.17 570,76.17 570,-52.09 630,-52.09 630,76.17 670,76.17 670,-137.54 730,-137.54 730,76.17 770,76.17 770,-52.09 830,-52.09 830,72.33 ; 570,1407.57 570,1532 630,1532 630,1403.73 670,1403.73 670,1532 730,1532 730,1403.73 770,1403.73 770,1532 830,1532 830,1403.73 870,1403.73 870,1532 930,1532 930,1403.73 970,1403.73 970,1532 1030,1532 1030,1403.73 ; 830,76.17 870,76.17 870,-52.09 930,-52.09 930,76.17 970,76.17 970,-52.09 1030,-52.09 1030,76.17 1070,76.17 1070,-52.09 1130,-52.09 1130,76.17 1170,76.17 1170,-52.09 1230,-52.09 1230,2 cw(c1265,2) 1300,2 ccw(c1400,2) 1400,102 cw(c1398.53,187.93) 1319.21,154.83 1319.21,662 1500,662 1500,822 1319.21,822 1319.21,1328.06 cw(c1400.19,1285.54) 1400,1377 ccw(c1400,1477) 1300,1477 cw(c1265,1477) 1230,1477 1230,1532 1170,1532 1170,1404.6 1130,1404.6 1130,1532 1070,1532 1070,1404.6 1030,1404.6 ; 1230,76.17 ccw(c1230.08,76.17) 1230.08,76.09

## Text inside footprints (layer, text, board x,y; h text height)
J4: [1] 3D Body Top "CARD EJECT" at 1520.39,42.2 h9.84 r90; [1] 3D Body Top "OVERSTROKE" at 1332.4,38.26 h9.84 r90; [1] 3D Body Top "LOCK" at 1362.91,96.33 h9.84 r90
SW1: Top Overlay "ON" at 455.32,1192.7 h59.06